# Altium PCB CuC_PCB.PcbDoc (part 1 of 4)
Units mm, origin at the board's own origin, x right, y up, seen from the top; angles counter-clockwise.
Board outline 203.71 x 204.22 mm, 2 copper layers (Top Layer, Bottom Layer); 421 components, 374 nets, 1366 pads, 155 vias.
Unrouted connection lines stored in the file: 2.
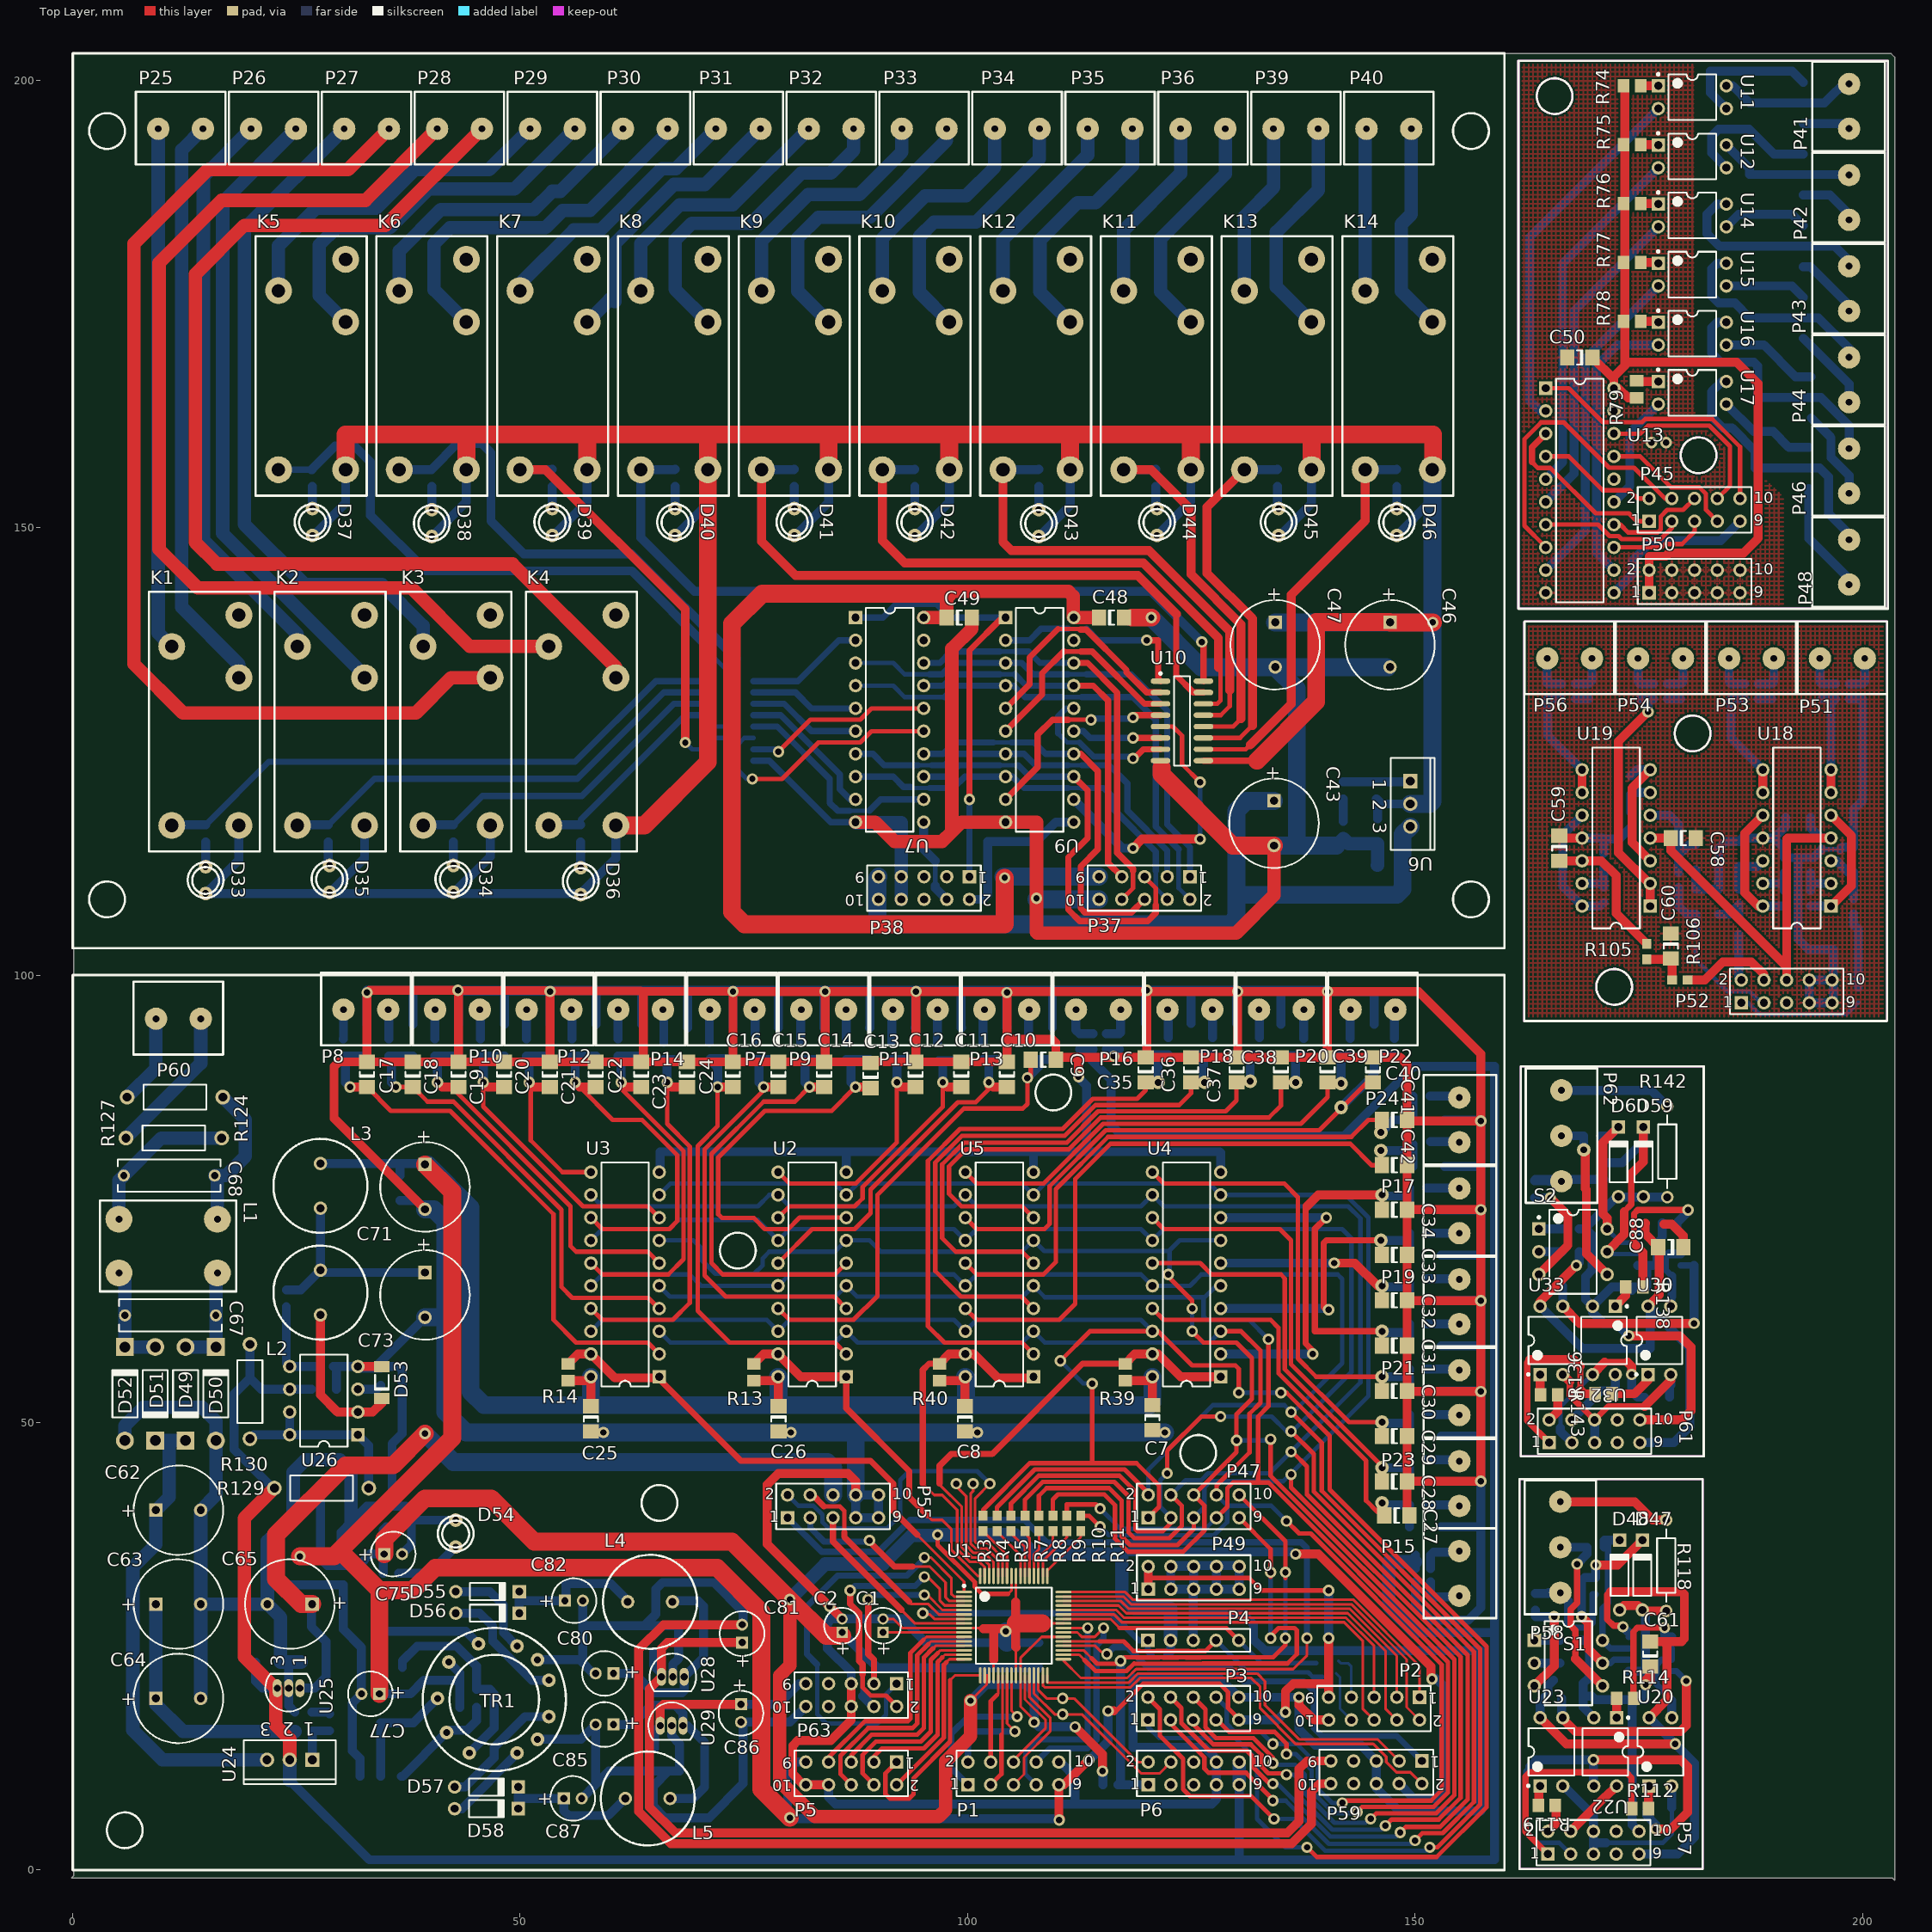
[diagram p0: Top Layer view]
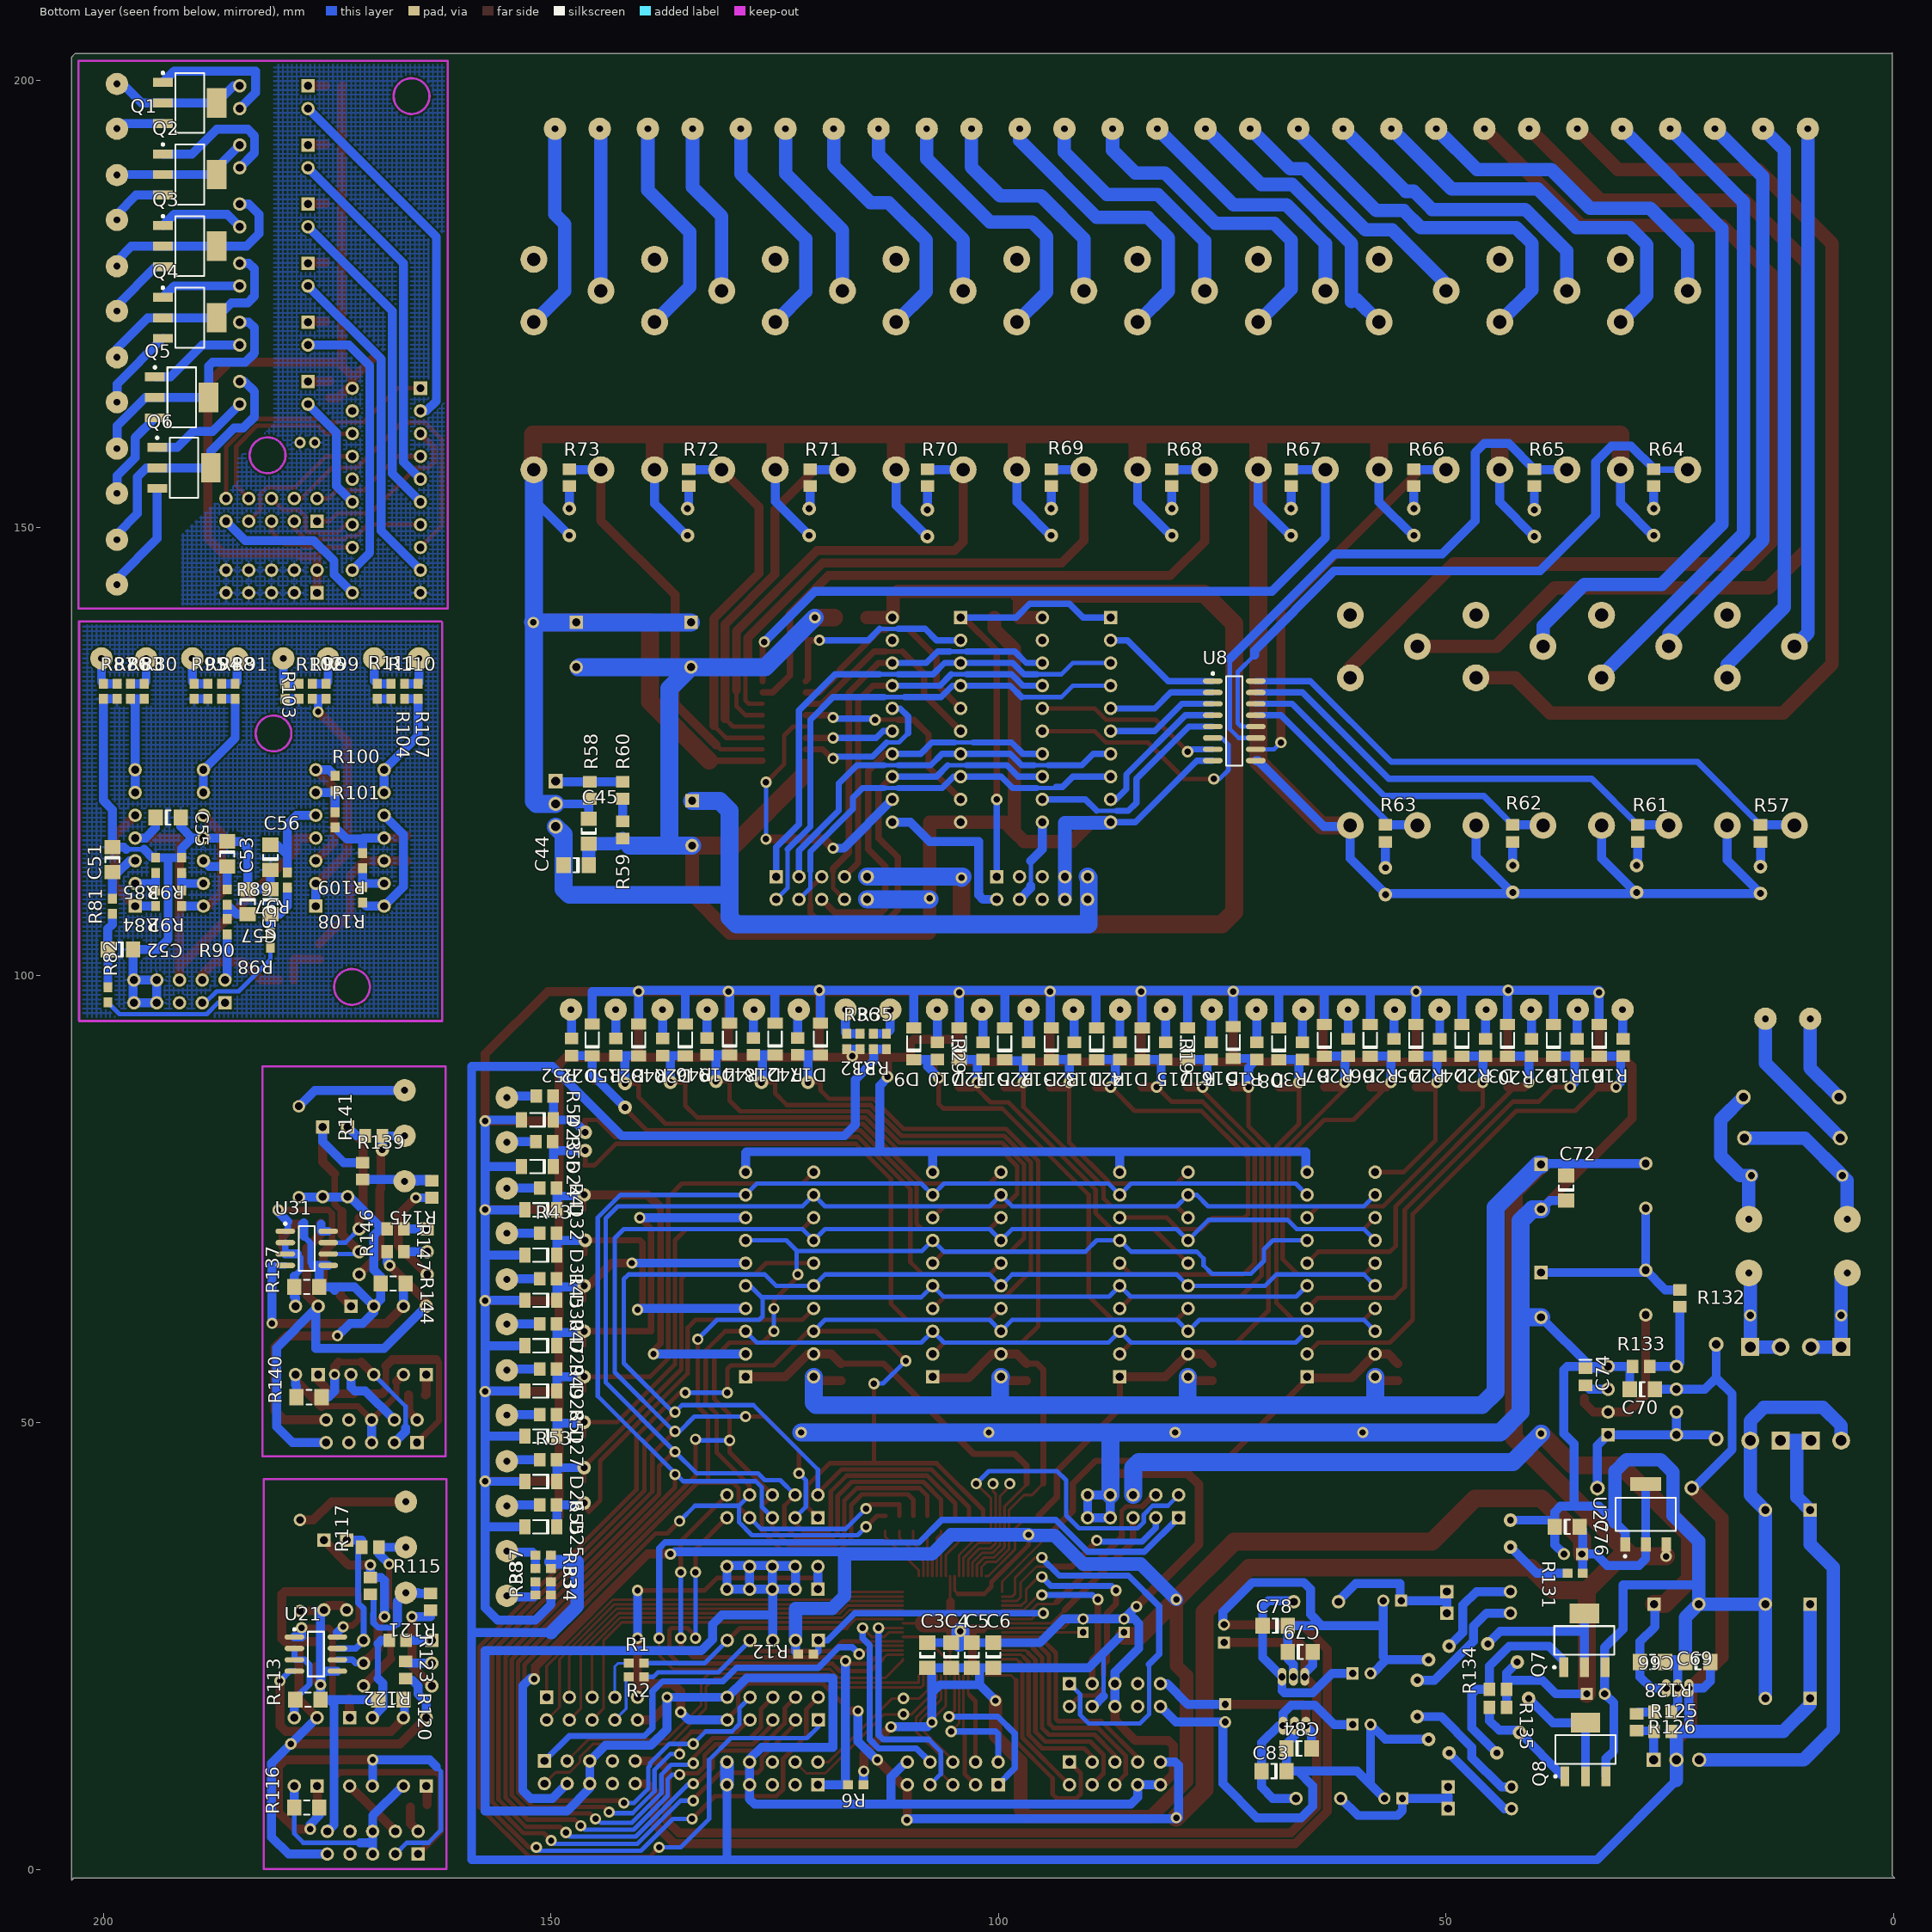
[diagram p1: Bottom Layer view, seen from below]

## Layer stack, top to bottom
Top Solder: solder mask 0.0102, Solder Resist, Dk 3.5
Top Layer: signal copper 0.0356
Dielectric1: dielectric 0.32, FR-4, Dk 4.8
Bottom Layer: signal copper 0.0356
Bottom Solder: solder mask 0.0102, Solder Resist, Dk 3.5

## Board outline
0.127,203.073 0.254,202.946 203.2,202.946 203.581,202.565 203.581,-1.143 203.327,-0.889 -0.127,-0.889 0.127,-0.635 0.127,202.946

## Design rules (kind name [scope] priority, off if disabled: settings)
Clearance [All] p1: gap=0.2
PolygonConnect [All] p1: connectstyle=Relief reliefconductorwidth=0.254 reliefentries=4 polygonreliefangle="90 Angle" airgapwidth=0.254
RoutingVias [All] p1: holewidth=0.711 width=1.27 viastyle="Through Hole" minholewidth=0.711 minwidth=1.27 maxholewidth=0.711 maxwidth=1.27
SolderMaskExpansion [All] p1: expansion=0.102
Width [All] p1: maxlimit=3 minlimit=0.2 preferedwidth=0.5
29 further rules are at their usual default settings.

## Classes and differential pairs
component class RelayOutput: C43 C44 C45 C46 C47 C48 C49 D33 D34 D35 D36 D37 D38 D39 D40 D41 D42 D43 D44 D45 D46 K1 K2 K3 K4 K5 K6 K7 K8 K9 K10 K11 K12 K13 K14 P25 P26 P27 P28 P29 P30 P31 P32 P33 P34 P35 P36 P37 P38 P39 P40 R57 R58 R59 R60 R61 R62 R63 R64 R65 R66 R67 R68 R69 R70 R71 R72 R73 U6 U7 U8 U9 U10
component class DigitalOutput: C50 P41 P42 P43 P44 P45 P46 P47 P48 P49 P50 Q1 Q2 Q3 Q4 Q5 Q6 R74 R75 R76 R77 R78 R79 U11 U12 U13 U14 U15 U16 U17
component class DigitalInput: C7 C8 C9 C10 C11 C12 C13 C14 C15 C16 C17 C18 C19 C20 C21 C22 C23 C24 C25 C26 C27 C28 C29 C30 C31 C32 C33 C34 C35 C36 C37 C38 C39 C40 C41 C42 D1 D2 D3 D4 D5 D6 D7 D8 D9 D10 D11 D12 D13 D14 D15 D16 D17 D18 D19 D20 D21 D22 D23 D24 D25 D26 D27 D28 D29 D30 D31 D32 P7 P8 P9 P10 P11 P12 P13 P14 P15 P16 P17 P18 P19 P20 P21 P22 P23 P24 R13 R14 R15 R16 R17 R18 R19 R20 R21 R22 R23 R24 R25 R26 R27 R28 R29 R30 R31 R32 R33 R34 R35 R36 R37 R38 R39 R40 R41 R42 R43 R44 R45 R46 R47 R48 R49 R50 R51 R52 R53 R54 R55 R56 U2 U3 U4 U5
component class CuC: C1 C2 C3 C4 C5 C6 P1 P2 P3 P4 P5 P6 R1 R2 R3 R4 R5 R6 R7 R8 R9 R10 R11 R12 U1
component class CuC_PSU: C62 C63 C64 C65 C66 C67 C68 C69 C70 C71 C72 C73 C74 C75 C76 C77 C78 C79 C80 C81 C82 C83 C84 C85 C86 C87 D49 D50 D51 D52 D53 D54 D55 D56 D57 D58 L1 L2 L3 L4 L5 P60 Q7 Q8 R124 R125 R126 R127 R128 R129 R130 R131 R132 R133 R134 R135 TR1 U24 U25 U26 U27 U28 U29
component class CuC_DataComm: C61 D47 D48 P57 P58 P59 R112 R113 R114 R115 R116 R117 R118 R119 R120 R121 R122 R123 S1 U20 U21 U22 U23
component class CuC_ControlComm: C88 D59 D60 P61 P62 P63 R136 R137 R138 R139 R140 R141 R142 R143 R144 R145 R146 R147 S2 U30 U31 U32 U33
component class AnalogOutput: C51 C52 C53 C54 C55 C56 C57 C58 C59 C60 P51 P52 P53 P54 P55 P56 R80 R81 R82 R83 R84 R85 R86 R87 R88 R89 R90 R91 R92 R93 R94 R95 R96 R97 R98 R99 R100 R101 R102 R103 R104 R105 R106 R107 R108 R109 R110 R111 U18 U19

## Components (designator, comment, footprint, x,y, rotation, side; value= is the part's Value field where it differs from the comment)
C1 "10uF" CAPPR1.5-4X7 90.551,27.305 r90 top
C2 "4u7" CAPPR1.5-4X7 85.979,27.305 r90 top
C3 "" 1206 107.95,24.003 r90 bottom
C4 "" 1206 105.283,24.003 r90 bottom
C5 "" 1206 102.997,24.003 r90 bottom
C6 "" 1206 100.584,24.003 r90 bottom
C7 "" 1206 120.65,50.546 r270 top
C8 "" 1206 99.695,50.419 r270 top
C9 "" 1206 108.458,90.551 r0 top
C10 "" 1206 104.394,88.9 r90 top
C11 "" 1206 99.287,88.9 r90 top
C12 "" 1206 94.18,88.9 r90 top
C13 "" 1206 89.154,88.773 r90 top
C14 "" 1206 83.965,88.9 r90 top
C15 "" 1206 78.858,88.9 r90 top
C16 "" 1206 73.751,88.9 r90 top
C17 "" 1206 32.893,88.9 r90 top
C18 "" 1206 38,88.9 r90 top
C19 "" 1206 43.107,88.9 r90 top
C20 "" 1206 48.215,88.9 r90 top
C21 "" 1206 53.322,88.9 r90 top
C22 "" 1206 58.429,88.9 r90 top
C23 "" 1206 63.536,88.9 r90 top
C24 "" 1206 68.643,88.9 r90 top
C25 "" 1206 57.912,50.419 r270 top
C26 "" 1206 78.867,50.419 r270 top
C27 "" 1206 147.955,39.624 r0 top
C28 "" 1206 147.701,43.416 r0 top
C29 "" 1206 147.701,48.478 r0 top
C30 "" 1206 147.701,53.54 r0 top
C31 "" 1206 147.701,58.601 r0 top
C32 "" 1206 147.701,63.663 r0 top
C33 "" 1206 147.701,68.725 r0 top
C34 "" 1206 147.701,73.787 r0 top
C35 "" 1206 119.888,89.408 r90 top
C36 "" 1206 124.968,89.408 r90 top
C37 "" 1206 130.048,89.408 r90 top
C38 "" 1206 135.001,89.408 r90 top
C39 "" 1206 140.208,89.408 r90 top
C40 "" 1206 145.288,89.408 r90 top
C41 "" 1206 147.701,83.82 r0 top
C42 "" 1206 147.701,78.768 r0 top
C43 "470uF" CAPPR5-10X16 134.239,116.967 r270 top
C44 "" 1206 147.193,112.268 r0 bottom
C45 "" 1206 145.796,116.078 r90 bottom
C46 "470uF" CAPPR5-10X16 147.193,136.906 r270 top
C47 "470uF" CAPPR5-10X16 134.366,136.906 r270 top
C48 "" 1206 116.078,139.954 r0 top
C49 "" 1206 99.06,139.954 r0 top
C50 "" 1206 168.402,169.001 r180 top
C51 "" 1206 199.009,112.903 r270 bottom
C52 "" 1206 198.12,102.87 r0 bottom
C53 "" 1206 186.182,113.538 r270 bottom
C54 "" 1206 183.896,108.204 r270 bottom
C55 "" 1206 192.786,117.602 r180 bottom
C56 "" 1206 181.356,113.157 r90 bottom
C57 "" 1206 181.356,108.204 r270 bottom
C58 "" 1206 179.959,115.316 r0 top
C59 "" 1206 166.116,114.173 r270 top
C60 "" 1206 178.562,103.251 r270 top
C61 "100nF" 1206 176.276,24.13 r90 top
C62 "470uF" CAPPR5-10X16 11.811,40.208 r0 top
C63 "470uF" CAPPR5-10X16 11.811,29.718 r0 top
C64 "470uF" CAPPR5-10X16 11.811,19.177 r0 top
C65 "470uF" CAPPR5-10X16 24.257,29.718 r180 top
C66 "" 1206 21.844,23.241 r180 bottom
C67 "220nF" VP60-3.6 10.922,61.976 r0 top
C68 "100nF" VP60-3.6 10.795,77.597 r0 top
C69 "" 1206 26.924,23.241 r0 bottom
C70 "" 1206 28.067,53.721 r180 bottom
C71 "470uF" CAPPR5-10X16 39.37,76.327 r270 top
C72 "" 1206 36.576,76.2 r90 bottom
C73 "470uF" CAPPR5-10X16 39.37,64.262 r270 top
C74 "" 0805 34.417,55.118 r270 bottom
C75 "100uF" CAPPR2-5X11 35.814,35.306 r0 top
C76 "" 1206 36.449,38.354 r180 bottom
C77 "100uF" CAPPR2-5X11 33.274,19.685 r180 top
C78 "" 1206 69.088,27.305 r0 bottom
C79 "" 1206 66.294,24.384 r180 bottom
C80 "100uF" CAPPR2-5X11 59.436,21.971 r180 top
C81 "100uF" CAPPR2-5X11 74.803,26.416 r90 top
C82 "100uF" CAPPR2-5X11 56.007,30.099 r0 top
C83 "" 1206 69.215,11.049 r0 bottom
C84 "" 1206 66.421,13.589 r180 bottom
C85 "100uF" CAPPR2-5X11 59.436,16.256 r180 top
C86 "100uF" CAPPR2-5X11 74.676,17.526 r270 top
C87 "100uF" CAPPR2-5X11 55.88,8.001 r0 top
C88 "100nF" 1206 178.562,69.596 r180 top
D1 "5V1" SOD80C 32.885,92.71 r270 bottom
D2 "5V1" SOD80C 38.002,92.71 r270 bottom
D3 "5V1" SOD80C 43.12,92.71 r270 bottom
D4 "5V1" SOD80C 48.237,92.71 r270 bottom
D5 "5V1" SOD80C 53.355,92.71 r270 bottom
D6 "5V1" SOD80C 58.472,92.71 r270 bottom
D7 "5V1" SOD80C 63.59,92.71 r270 bottom
D8 "5V1" SOD80C 68.697,92.329 r270 bottom
D9 "5V1" SOD80C 109.474,92.329 r270 bottom
D10 "5V1" SOD80C 104.394,92.329 r270 bottom
D11 "5V1" SOD80C 99.314,92.329 r270 bottom
D12 "5V1" SOD80C 94.107,92.329 r270 bottom
D13 "5V1" SOD80C 89.027,92.329 r270 bottom
D14 "5V1" SOD80C 83.947,92.329 r270 bottom
D15 "5V1" SOD80C 78.867,92.329 r270 bottom
D16 "5V1" SOD80C 73.787,92.456 r270 bottom
D17 "5V1" SOD80C 119.888,92.837 r270 bottom
D18 "5V1" SOD80C 124.968,92.837 r270 bottom
D19 "5V1" SOD80C 130.048,92.837 r270 bottom
D20 "5V1" SOD80C 135.001,92.748 r270 bottom
D21 "5V1" SOD80C 140.208,92.748 r270 bottom
D22 "5V1" SOD80C 145.415,92.748 r270 bottom
D23 "5V1" SOD80C 151.511,83.82 r180 bottom
D24 "5V1" SOD80C 151.511,78.613 r180 bottom
D25 "5V1" SOD80C 151.13,38.354 r180 bottom
D26 "5V1" SOD80C 151.13,43.413 r180 bottom
D27 "5V1" SOD80C 151.13,48.473 r180 bottom
D28 "5V1" SOD80C 151.13,53.532 r180 bottom
D29 "5V1" SOD80C 151.13,58.592 r180 bottom
D30 "5V1" SOD80C 151.13,63.651 r180 bottom
D31 "5V1" SOD80C 151.13,68.711 r180 bottom
D32 "5V1" SOD80C 151.13,73.77 r180 bottom
D33 "LED 3mm" "LED 3mm" 14.859,110.617 r270 top
D34 "LED 3mm" "LED 3mm" 42.545,110.744 r270 top
D35 "LED 3mm" "LED 3mm" 28.702,110.744 r270 top
D36 "LED 3mm" "LED 3mm" 56.769,110.49 r270 top
D37 "LED 3mm" "LED 3mm" 26.797,150.622 r270 top
D38 "LED 3mm" "LED 3mm" 40.132,150.495 r270 top
D39 "LED 3mm" "LED 3mm" 53.594,150.622 r270 top
D40 "LED 3mm" "LED 3mm" 67.31,150.622 r270 top
D41 "LED 3mm" "LED 3mm" 80.645,150.622 r270 top
D42 "LED 3mm" "LED 3mm" 94.107,150.622 r270 top
D43 "LED 3mm" "LED 3mm" 107.95,150.495 r270 top
D44 "LED 3mm" "LED 3mm" 121.158,150.622 r270 top
D45 "LED 3mm" "LED 3mm" 134.747,150.622 r270 top
D46 "LED 3mm" "LED 3mm" 147.955,150.622 r270 top
D47 "13V" DO-35A 175.387,32.959 r90 top
D48 "13V" DO-35A 172.847,32.959 r90 top
D49 "1N4001" DO-41 12.615,53.213 r270 top
D50 "1N4001" DO-41 16.002,53.213 r90 top
D51 "1N4001" DO-41 9.229,53.213 r270 top
D52 "1N4001" DO-41 5.842,53.213 r90 top
D53 "BAV102" SOD80C 34.544,54.483 r270 top
D54 "3V3 POWER OK" "LED 3mm" 42.799,37.592 r270 top
D55 "1N4148" DO-35 46.355,31.115 r0 top
D56 "1N4148" DO-35 46.355,28.702 r0 top
D57 "1N4148" DO-35 46.228,9.271 r0 top
D58 "1N4148" DO-35 46.228,6.858 r0 top
D59 "13V" DO-35A 175.514,79.134 r90 top
D60 "13V" DO-35A 172.72,79.134 r90 top
K1 "FINDER RELAY 40.31" "FINDER 40.31" 14.224,128.016 r90 top
K2 "FINDER RELAY 40.31" "FINDER 40.31" 28.266,128.016 r90 top
K3 "FINDER RELAY 40.31" "FINDER 40.31" 42.307,128.016 r90 top
K4 "FINDER RELAY 40.31" "FINDER 40.31" 56.349,128.016 r90 top
K5 "FINDER RELAY 40.31" "FINDER 40.31" 26.152,167.767 r90 top
K6 "FINDER RELAY 40.31" "FINDER 40.31" 39.644,167.767 r90 top
K7 "FINDER RELAY 40.31" "FINDER 40.31" 53.135,167.767 r90 top
K8 "FINDER RELAY 40.31" "FINDER 40.31" 66.626,167.767 r90 top
K9 "FINDER RELAY 40.31" "FINDER 40.31" 80.117,167.767 r90 top
K10 "FINDER RELAY 40.31" "FINDER 40.31" 93.609,167.767 r90 top
K11 "FINDER RELAY 40.31" "FINDER 40.31" 120.591,167.767 r90 top
K12 "FINDER RELAY 40.31" "FINDER 40.31" 107.1,167.767 r90 top
K13 "FINDER RELAY 40.31" "FINDER 40.31" 134.083,167.767 r90 top
K14 "FINDER RELAY 40.31" "FINDER 40.31" 147.574,167.767 r90 top
L1 "CMC filter" "MREZNI FILTER" 10.668,69.723 r0 top
L2 "" RB5-10.5 27.686,64.516 r90 top
L3 "" RB5-10.5 27.686,76.454 r90 top
L4 "" RB5-10.5 64.516,29.972 r0 top
L5 "" RB5-10.5 64.262,8.001 r0 top
P1 "PORTA" HDR2X5 100.034,9.525 r0 top
P2 "PORTB" HDR2X5 150.495,19.304 r180 top
P3 "DATA_BUS" HDR2X5 120.142,16.764 r0 top
P4 "PICKIT3_ICSP" HDR1X5 120.142,25.654 r0 top
P5 "PORTF" HDR2X5 92.075,12.065 r180 top
P6 "OUTPUT_CONTROL" HDR2X5 120.184,9.525 r0 top
P7 "" "TERMINAL BLOK 2" 73.683,96.139 r90 top
P8 "" "TERMINAL BLOK 2" 32.766,96.139 r90 top
P9 "" "TERMINAL BLOK 2" 83.912,96.139 r90 top
P10 "" "TERMINAL BLOK 2" 42.995,96.139 r90 top
P11 "" "TERMINAL BLOK 2" 94.142,96.139 r90 top
P12 "" "TERMINAL BLOK 2" 53.225,96.139 r90 top
P13 "" "TERMINAL BLOK 2" 104.371,96.139 r90 top
P14 "" "TERMINAL BLOK 2" 63.454,96.139 r90 top
P15 "" "TERMINAL BLOK 2" 154.94,33.147 r0 top
P16 "" "TERMINAL BLOK 2" 114.6,96.139 r90 top
P17 "" "TERMINAL BLOK 2" 154.94,73.66 r0 top
P18 "" "TERMINAL BLOK 2" 124.829,96.139 r90 top
P19 "" "TERMINAL BLOK 2" 154.94,63.5 r0 top
P20 "" "TERMINAL BLOK 2" 135.059,96.139 r90 top
P21 "" "TERMINAL BLOK 2" 154.94,53.34 r0 top
P22 "" "TERMINAL BLOK 2" 145.288,96.139 r90 top
P23 "" "TERMINAL BLOK 2" 154.94,43.18 r0 top
P24 "" "TERMINAL BLOK 2" 154.94,83.82 r0 top
P25 "VACUM_PUMP1" "TERMINAL BLOK 2" 12.065,194.564 r90 top
P26 "VACUM_PUMP2" "TERMINAL BLOK 2" 22.45,194.564 r90 top
P27 "VACUM_PUMP3" "TERMINAL BLOK 2" 32.834,194.564 r90 top
P28 "VACUM_PUMP4" "TERMINAL BLOK 2" 43.219,194.564 r90 top
P29 "FEEDER1_VACUM_VALVE" "TERMINAL BLOK 2" 53.604,194.564 r90 top
P30 "FEEDER2_VACUM_VALVE" "TERMINAL BLOK 2" 63.988,194.564 r90 top
P31 "FEEDER3_VACUM_VALVE" "TERMINAL BLOK 2" 74.373,194.564 r90 top
P32 "FEEDER4_VACUM_VALVE" "TERMINAL BLOK 2" 84.758,194.564 r90 top
P33 "FEEDER1_CLEANING_VALVE" "TERMINAL BLOK 2" 95.143,194.564 r90 top
P34 "FEEDER2_CLEANING_VALVE" "TERMINAL BLOK 2" 105.527,194.564 r90 top
P35 "FEEDER3_CLEANING_VALVE" "TERMINAL BLOK 2" 115.912,194.564 r90 top
P36 "FEEDER4_CLEANING_VALVE" "TERMINAL BLOK 2" 126.297,194.564 r90 top
P37 "Header 5X2" HDR2X5 124.841,110.998 r180 top
P38 "Header 5X2" HDR2X5 100.203,110.998 r180 top
P39 "WATCH_DOG" "TERMINAL BLOK 2" 136.681,194.564 r90 top
P40 "ALARM" "TERMINAL BLOK 2" 147.066,194.564 r90 top
P41 "DRIVE_1_RUN" "TERMINAL BLOK 2" 198.501,197.068 r180 top
P42 "DRIVE_2_RUN" "TERMINAL BLOK 2" 198.501,186.883 r180 top
P43 "DRIVE_3_RUN" "TERMINAL BLOK 2" 198.501,176.697 r180 top
P44 "DRIVE_4_RUN" "TERMINAL BLOK 2" 198.501,166.512 r180 top
P45 "Header 5X2" HDR2X5 176.149,150.713 r0 top
P46 "AUX_0" "TERMINAL BLOK 2" 198.501,156.326 r180 top
P47 "Header 5X2" HDR2X5 120.184,39.37 r0 top
P48 "AUX_1" "TERMINAL BLOK 2" 198.501,146.141 r180 top
P49 "Header 5X2" HDR2X5 120.184,31.369 r0 top
P50 "Header 5X2" HDR2X5 176.149,142.712 r0 top
P51 "AN0_OUT" "TERMINAL BLOK 2" 197.739,135.382 r90 top
P52 "Header 5X2" HDR2X5 186.436,96.901 r0 top
P53 "AN1_OUT" "TERMINAL BLOK 2" 187.579,135.382 r90 top
P54 "AN2_OUT" "TERMINAL BLOK 2" 177.419,135.382 r90 top
P55 "Header 5X2" HDR2X5 79.883,39.37 r0 top
P56 "AN3_OUT" "TERMINAL BLOK 2" 167.259,135.382 r90 top
P57 "Header 5X2" HDR2X5 164.846,1.778 r0 top
P58 "RS485" "TERMINAL BLOK 3" 166.23,36.068 r0 top
P59 "Header 5X2" HDR2X5 150.749,12.192 r180 top
P60 "T.blok 2" "TERMINAL BLOK 2" 11.811,95.123 r90 top
P61 "Header 5X2" HDR2X5 164.973,47.752 r0 top
P62 "RS485" "TERMINAL BLOK 3" 166.357,82.042 r0 top
P63 "Header 5X2" HDR2X5 92.075,20.828 r180 top
Q1 "BCP56" SOT223_N 190.373,197.449 r180 bottom
Q2 "BCP56" SOT223_N 190.373,189.448 r180 bottom
Q3 "BCP56" SOT223_N 190.373,181.447 r180 bottom
Q4 "BCP56" SOT223_N 190.373,173.446 r180 bottom
Q5 "BCP56" SOT223_N 191.262,164.556 r180 bottom
Q6 "BCP56" SOT223_N 191.008,156.682 r180 bottom
Q7 "BCP56-10" SOT223_N 34.544,25.654 r90 bottom
Q8 "BCP56-10" SOT223_N 34.417,13.462 r90 bottom
R1 "10K" ERA-0603 140.462,23.114 r180 bottom
R2 "10K" ERA-0603 140.462,21.59 r180 bottom
R3 "47R" ERA-0603 101.727,38.735 r90 top
R4 "47R" ERA-0603 103.287,38.735 r90 top
R5 "47R" ERA-0603 104.848,38.735 r90 top
R6 "10K" ERA-0603 115.951,9.525 r180 bottom
R7 "47R" ERA-0603 106.408,38.735 r90 top
R8 "47R" ERA-0603 107.968,38.735 r90 top
R9 "47R" ERA-0603 109.528,38.735 r90 top
R10 "47R" ERA-0603 111.089,38.735 r90 top
R11 "47R" ERA-0603 112.649,38.735 r90 top
R12 "10K" ERA-0603 121.539,24.13 r0 bottom
R13 "10K" ERA-0805 76.115,55.626 r270 top
R14 "10K" ERA-0805 55.372,55.626 r270 top
R15 "10K" ERA-0805 71.145,91.529 r270 bottom
R16 "10K" ERA-0805 30.226,91.91 r270 bottom
R17 "10K" ERA-0805 76.243,91.529 r270 bottom
R18 "10K" ERA-0805 35.343,91.91 r270 bottom
R19 "10K" ERA-0805 81.34,91.529 r270 bottom
R20 "10K" ERA-0805 40.461,91.91 r270 bottom
R21 "10K" ERA-0805 86.437,91.529 r270 bottom
R22 "10K" ERA-0805 45.578,91.91 r270 bottom
R23 "10K" ERA-0805 91.534,91.529 r270 bottom
R24 "10K" ERA-0805 50.696,91.91 r270 bottom
R25 "10K" ERA-0805 96.631,91.529 r270 bottom
R26 "10K" ERA-0805 55.813,91.91 r270 bottom
R27 "10K" ERA-0805 101.728,91.529 r270 bottom
R28 "10K" ERA-0805 60.931,91.91 r270 bottom
R29 "10K" ERA-0805 106.825,91.529 r270 bottom
R30 "10K" ERA-0805 66.048,91.529 r270 bottom
R31 "10R" ERA-0603 112.522,92.583 r270 bottom
R32 "10R" ERA-0603 114.004,92.583 r270 bottom
R33 "10R" ERA-0603 150.876,35.179 r180 bottom
R34 "10R" ERA-0603 150.876,33.697 r180 bottom
R35 "10R" ERA-0603 115.485,92.583 r90 bottom
R36 "10R" ERA-0603 116.967,92.583 r90 bottom
R37 "10R" ERA-0603 150.876,32.216 r0 bottom
R38 "10R" ERA-0603 150.876,30.734 r0 bottom
R39 "10K" ERA-0805 117.602,55.626 r270 top
R40 "10K" ERA-0805 96.859,55.626 r270 top
R41 "10K" ERA-0805 150.33,76.2 r180 bottom
R42 "10K" ERA-0805 122.428,92.037 r270 bottom
R43 "10K" ERA-0805 150.33,71.141 r180 bottom
R44 "10K" ERA-0805 127.381,92.037 r270 bottom
R45 "10K" ERA-0805 150.33,66.081 r180 bottom
R46 "10K" ERA-0805 132.588,92.037 r270 bottom
R47 "10K" ERA-0805 150.33,61.022 r180 bottom
R48 "10K" ERA-0805 137.541,91.948 r270 bottom
R49 "10K" ERA-0805 150.33,55.962 r180 bottom
R50 "10K" ERA-0805 142.748,91.948 r270 bottom
R51 "10K" ERA-0805 150.33,50.903 r180 bottom
R52 "10K" ERA-0805 147.701,91.948 r270 bottom
R53 "10K" ERA-0805 150.33,45.843 r180 bottom
R54 "10K" ERA-0805 150.711,86.487 r180 bottom
R55 "10K" ERA-0805 150.33,40.784 r180 bottom
R56 "10K" ERA-0805 150.749,81.407 r180 bottom
R57 "1K" ERA-0805 14.859,115.824 r90 bottom
R58 "240R" ERA-0805 145.669,120.65 r270 bottom
R59 "1K8" ERA-0805 141.986,116.205 r270 bottom
R60 "330R" ERA-0805 141.986,120.65 r270 bottom
R61 "1K" ERA-0805 28.575,115.824 r90 bottom
R62 "1K" ERA-0805 42.545,115.824 r90 bottom
R63 "1K" ERA-0805 56.769,115.824 r90 bottom
R64 "1K" ERA-0805 26.797,155.575 r90 bottom
R65 "1K" ERA-0805 40.132,155.575 r90 bottom
R66 "1K" ERA-0805 53.594,155.575 r90 bottom
R67 "1K" ERA-0805 67.31,155.575 r90 bottom
R68 "1K" ERA-0805 80.645,155.575 r90 bottom
R69 "1K" ERA-0805 94.107,155.575 r90 bottom
R70 "1K" ERA-0805 107.95,155.575 r90 bottom
R71 "1K" ERA-0805 121.031,155.575 r90 bottom
R72 "1K" ERA-0805 134.62,155.575 r90 bottom
R73 "1K" ERA-0805 147.955,155.575 r90 bottom
R74 "470R" ERA-0805 174.244,199.354 r180 top
R75 "470R" ERA-0805 174.244,192.775 r180 top
R76 "470R" ERA-0805 174.244,186.197 r180 top
R77 "470R" ERA-0805 174.244,179.618 r180 top
R78 "470R" ERA-0805 174.244,173.04 r180 top
R79 "470R" ERA-0805 174.752,165.445 r270 top
R80 "10R" ERA-0603 195.453,131.699 r90 bottom
R81 "2K7" ERA-0603 199.009,107.696 r270 bottom
R82 "2K7" ERA-0603 199.517,97.79 r270 bottom
R83 "10R" ERA-0603 196.977,131.699 r90 bottom
R84 "20K3" ERA-0603 194.183,108.585 r270 bottom
R85 "10K" ERA-0603 194.183,112.268 r270 bottom
R86 "10R" ERA-0603 198.501,131.699 r90 bottom
R87 "10R" ERA-0603 200.025,131.699 r90 bottom
R88 "10R" ERA-0603 186.817,131.699 r90 bottom
R89 "2K7" ERA-0603 186.182,108.712 r270 bottom
R90 "2K7" ERA-0603 186.182,105.41 r270 bottom
R91 "10R" ERA-0603 185.293,131.699 r90 bottom
R92 "20K3" ERA-0603 191.262,108.585 r270 bottom
R93 "10K" ERA-0603 191.262,112.268 r270 bottom
R94 "10R" ERA-0603 188.341,131.699 r90 bottom
R95 "10R" ERA-0603 189.865,131.699 r90 bottom
R96 "10R" ERA-0603 176.657,131.699 r90 bottom
R97 "2K7" ERA-0603 179.451,110.617 r270 bottom
R98 "2K7" ERA-0603 181.356,103.886 r270 bottom
R99 "10R" ERA-0603 175.133,131.699 r90 bottom
R100 "20K3" ERA-0603 174.117,121.412 r90 bottom
R101 "10K" ERA-0603 174.117,117.348 r90 bottom
R102 "10R" ERA-0603 178.181,131.699 r90 bottom
R103 "10R" ERA-0603 179.705,131.699 r90 bottom
R104 "10R" ERA-0603 166.37,131.699 r90 bottom
R105 "2K7" ERA-0603 175.895,102.616 r270 top
R106 "2K7" ERA-0603 179.578,99.441 r0 top
R107 "10R" ERA-0603 164.846,131.699 r90 bottom
R108 "20K3" ERA-0603 171.069,108.966 r270 bottom
R109 "10K" ERA-0603 171.069,112.776 r270 bottom
R110 "10R" ERA-0603 167.894,131.699 r90 bottom
R111 "10R" ERA-0603 169.418,131.699 r90 bottom
R112 "330R" ERA-0805 175.133,6.858 r180 top
R113 "820R" 8-1206 177.165,19.05 r0 bottom
R114 "220R" ERA-0805 173.482,19.177 r0 top
R115 "47R" ERA-0805 170.18,31.75 r90 bottom
R116 "820R" 8-1206 177.292,6.985 r0 bottom
R117 "47R" ERA-0805 170.18,36.068 r0 bottom
R118 "100R" AXIAL-0.4 178.054,34.036 r90 top
R119 "330R" ERA-0805 164.719,7.239 r0 top
R120 "820R" 8-1206 167.894,19.05 r180 bottom
R121 "120R" ERA-0805 163.449,29.972 r270 bottom
R122 "560R" ERA-0805 166.243,22.352 r270 bottom
R123 "560R" ERA-0805 167.132,25.654 r180 bottom
R124 "1R" R6.35x2.3 11.43,86.36 r180 top
R125 "240R" ERA-0805 25.781,15.494 r0 bottom
R126 "2K" ERA-0805 28.702,16.51 r270 bottom
R127 "1R" R6.35x2.3 11.303,81.788 r180 top
R128 "2K2" ERA-0805 25.781,17.653 r0 bottom
R129 "0R47" RD6.35x2.3 27.813,42.672 r0 top
R130 "0R47" RD6.35x2.3 19.812,53.467 r270 top
R131 "330R" ERA-0603 35.56,33.147 r0 bottom
R132 "3K6" ERA-0805 23.876,63.881 r90 bottom
R133 "1k2" ERA-0805 28.194,56.261 r180 bottom
R134 "10K" ERA-0805 44.196,20.193 r0 bottom
R135 "10K" ERA-0805 44.196,18.161 r180 bottom
R136 "330R" ERA-0805 171.069,53.213 r180 top
R137 "820R" 8-1206 177.292,65.151 r0 bottom
R138 "220R" ERA-0805 174.498,65.151 r0 top
R139 "47R" ERA-0805 171.069,78.105 r90 bottom
R140 "820R" 8-1206 177.038,52.832 r0 bottom
R141 "47R" ERA-0805 169.799,82.042 r0 bottom
R142 "100R" AXIAL-0.4 178.181,80.264 r90 top
R143 "330R" ERA-0805 164.973,53.086 r0 top
R144 "820R" 8-1206 167.64,65.532 r180 bottom
R145 "120R" ERA-0805 163.322,76.073 r270 bottom
R146 "560R" ERA-0805 167.386,69.088 r0 bottom
R147 "560R" ERA-0805 167.386,71.628 r180 bottom
S1 "" DIP-6 167.132,23.114 r0 top
S2 "" DIP-6 167.64,69.088 r0 top
TR1 "ISOLATION TRAFO 2" "ISOLATION TRAFO 2" 47.117,19.177 r0 top
U1 "PIC18F66J11-I/PT" TQFP-PT64_N 105.156,27.305 r0 top
U2 "SN54ALS244CJ" J020 82.635,66.548 r90 top
U3 "SN54ALS244CJ" J020 61.722,66.548 r90 top
U4 "SN54ALS244CJ" J020 124.46,66.548 r90 top
U5 "SN54ALS244CJ" J020 103.547,66.548 r90 top
U6 "LM317T" 221A-04 149.479,119.126 r270 top
U7 "SN74ALS374N" N020D 91.286,128.524 r270 top
U8 "ULN2003L" L16_N 73.66,128.401 r180 bottom
U9 "SN74ALS374N" N020D 108.05,128.524 r270 top
U10 "ULN2003L" L16_N 123.952,128.401 r0 top
U11 "PC817" DIP-4 180.975,198.084 r0 top
U12 "PC817" DIP-4 180.975,191.48 r0 top
U13 "SN74ALS374N" N020D 168.402,154.142 r270 top
U14 "PC817" DIP-4 180.975,184.876 r0 top
U15 "PC817" DIP-4 180.975,178.272 r0 top
U16 "PC817" DIP-4 180.975,171.668 r0 top
U17 "PC817" DIP-4 180.975,165.064 r0 top
U18 "LM324AN" DIP14 192.659,115.316 r90 top
U19 "LM324AN" DIP14 172.466,115.316 r90 top
U20 "PC817" DIP-4 177.419,13.208 r90 top
U21 "MAX485ESA" NSO8_N 176.276,24.13 r180 bottom
U22 "PC817" DIP-4 171.238,13.208 r270 top
U23 "PC817" DIP-4 165.227,13.208 r90 top
U24 "LM317T" 221A-04 24.257,12.319 r180 top
U25 "MC78L15ACP" 29-04 24.13,20.32 r90 top
U26 "MC34063AD" 626-05 28.067,52.451 r90 top
U27 "REG1117-3.3" ZZ311 27.686,39.751 r180 bottom
U28 "MC78L05ABP" 29-04 67.056,21.59 r270 top
U29 "MC78L05ABP" 29-04 66.929,16.129 r270 top
U30 "PC817" DIP-4 177.292,59.182 r90 top
U31 "MAX485ESA" NSO8_N 177.292,69.469 r180 bottom
U32 "PC817" DIP-4 171.09,59.182 r270 top
U33 "PC817" DIP-4 165.227,59.182 r90 top

## Footprints (in the part's own frame and the unit in brackets; to place one, negate y for a bottom-side part, rotate by r counter-clockwise, add the part's x,y. Pads: shape width x height; smd on the part's side, far side on the other; paste and mask are expansions set on the pad)
8-1206 [mm] "Chip Resistor; Body 3.1 x 1.6 mm (LxW typ)"
  rect 1.6x1.8 smd: 1(-1.4,0) 2(1.4,0)
  silkscreen extent -0.3,-0.8 0.3,0.8
29-04 [mm] "TO, Flat Index; 3 In-Line, Axial Leads; Body Dia. 4.8mm; Leads 0.48 x 0.5 mm (max)"
  oval 2x1 hole 0.8: 1(0,-1.27) 2(0,0) 3(0,1.27)
  silkscreen extent -2.6,-2.6 1.6,2.6
221A-04 [mm] "TO, Thru-Hole, Vertical, Heatsink Mounted; 3 In-Line Leads; Pitch 2.54 mm"
  rect 1.6x1.6 hole 1: 1(-2.54,0)
  round 1.6 hole 1: 2(0,0) 3(2.54,0)
  silkscreen extent -5.15,-2.2 5.15,2.7
626-05 [mm] "DIP; 8 Leads; Row Spacing 7.62 mm; Pitch 2.54 mm"
  rect 1.5x1.5 hole 0.9: 1(-3.81,-3.81)
  round 1.5 hole 0.9: 2(-1.27,-3.81) 3(1.27,-3.81) 4(3.81,-3.81) 5(3.81,3.81) 6(1.27,3.81) 7(-1.27,3.81) 8(-3.81,3.81)
  silkscreen extent -5.15,-2.65 5.15,2.65
0805 [mm] "Chip Capacitor; Body 2.0 x 1.2 mm (LxW typ)"
  rect 1.3x1.5 smd: 1(-0.95,0) 2(0.95,0)
  silkscreen extent -1.9,-0.65 -1.9,0.65
1206 [mm] "Chip Capacitor; Body 3.2 x 1.6 mm (LxW typ)"
  rect 1.6x1.8 smd: 1(-1.4,0) 2(1.4,0)
  silkscreen extent -0.3,-0.8 0.3,0.8
AXIAL-0.4 [mm] "Axial Device, Thru-Hole; 2 Leads; 0.4 in Pin Spacing"
  round 1.4 hole 0.85: 1(-5.08,0) 2(5.08,0)
  silkscreen extent -4.06,-1.02 4.06,1.02
CAPPR1.5-4X7 [mm] "Capacitor, Electrolytic, Radial; Body 4 x 7 mm (Dia.xH typ); Pin Spacing 1.5 mm (typ)"
  rect 1.25x1.25 hole 0.75: 1(-0.75,0)
  round 1.25 hole 0.75: 2(0.75,0)
  silkscreen extent -2,-2 2,2
CAPPR2-5X11 [mm] "Capacitor, Electrolytic, Radial; Body 5 x 11 mm (Dia.xH typ); Pin Spacing 2 mm (typ)"
  rect 1.35x1.35 hole 0.8: 1(-1,0)
  round 1.35 hole 0.8: 2(1,0)
  silkscreen extent -2.5,-2.5 2.5,2.5
CAPPR5-10X16 [mm] "Capacitor, Electrolytic, Radial; Body 10 x 16 mm (Dia.xH typ); Pin Spacing 5 mm (typ)"
  rect 1.5x1.5 hole 0.9: 1(-2.5,0)
  round 1.5 hole 0.9: 2(2.5,0)
  silkscreen extent -5,-5 5,5
DIP14 [mm] "DIP; 14 Leads; Row Spacing 7.62 mm; Pitch 2.54 mm"
  rect 1.5x1.5 hole 0.9: 1(-7.62,-3.81)
  round 1.5 hole 0.9: 2(-5.08,-3.81) 3(-2.54,-3.81) 4(0,-3.81) 5(2.54,-3.81) 6(5.08,-3.81) 7(7.62,-3.81) 8(7.62,3.81) 9(5.08,3.81) 10(2.54,3.81) 11(0,3.81) 12(-2.54,3.81) 13(-5.08,3.81) 14(-7.62,3.81)
  silkscreen extent -10.1,-2.65 10.1,2.65
DIP-4 [mm] "DIP; 4 Leads; Row Spacing 7.62 mm; Pitch 2.54 mm"
  rect 1.5x1.5 hole 0.9: 1(-3.81,1.27)
  round 1.5 hole 0.9: 2(-3.81,-1.27) 3(3.81,-1.27) 4(3.81,1.27)
  silkscreen extent -3.93,-2.55 2.65,2.69, body extent -3.15,-2.5 3.15,2.5, height 5.6
DIP-6 [mm] "DIP; 6 Leads; Row Spacing 7.62 mm; Pitch 2.54 mm"
  rect 1.5x1.5 hole 0.9: 1(-3.81,2.54)
  round 1.5 hole 0.9: 2(-3.81,0) 3(-3.81,-2.54) 4(3.81,-2.54) 5(3.81,0) 6(3.81,2.54)
  silkscreen extent -3.93,-4.7 2.65,4.7, body extent -3.55,-4.7 3.55,4.7, height 5.46
DO-35 [mm] "Diode, Axial; Body 3.8 x 1.9 mm (LxDia. max), Lead Dia. 0.53 mm (max)"
  round 1.5 hole 0.9: 1(-3.55,0)
  rect 1.5x1.5 hole 0.9: 2(3.55,0)
  silkscreen extent -1.95,-0.95 2.05,0.95
DO-35A [mm] "Diode, Axial; Body 4.6 x 1.9 mm (LxDia. max), Lead Dia. 0.53 mm (max)"
  round 1.5 hole 0.9: 1(-3.9,0)
  rect 1.5x1.5 hole 0.9: 2(3.9,0)
  silkscreen extent -2.3,-1 2.4,1
DO-41 [mm] "Diode, Axial; Body 5.2 x 2.7 mm (LxDia. max), Lead Dia. 0.86 mm (max)"
  round 2 hole 1.2: 1(-5.23,0)
  rect 2x2 hole 1.2: 2(5.23,0)
  silkscreen extent -2.65,-1.4 2.75,1.4
ERA-0603 [mm] "Chip Resistor; Body 1.6 x 0.8 mm (LxW typ)"
  rect 1.1x1 smd: 1(-0.85,0) 2(0.85,0)
ERA-0805 [mm] "Chip Resistor; Body 2 x 1.3 mm (LxW typ)"
  rect 1.3x1.5 smd: 1(-0.95,0) 2(0.95,0)
"FINDER 40.31" [mm] "Finder raly tip 40.31"
  round 3 hole 1.5: 1(-11.3,-4.35) 2(-11.3,3.15) 3(5.2,-4.35) 4(8.7,3.15) 5(12.2,-4.35)
  silkscreen extent -14.2,-6.7 14.8,5.7
HDR1X5 [mm] "Connector; Header; 5 Position"
  rect 1.5x1.5 hole 0.9: 1(0,0)
  round 1.5 hole 0.9: 2(2.54,0) 3(5.08,0) 4(7.62,0) 5(10.16,0)
  silkscreen extent -1.27,-1.27 11.43,1.27
HDR2X5 [mm] "Connector; Header; 5x2 Position"
  rect 1.5x1.5 hole 0.9: 1(0,0)
  round 1.5 hole 0.9: 2(0,2.54) 3(2.54,0) 4(2.54,2.54) 5(5.08,0) 6(5.08,2.54) 7(7.62,0) 8(7.62,2.54) 9(10.16,0) 10(10.16,2.54)
  silkscreen extent -1.27,-1.27 11.43,3.81
"ISOLATION TRAFO 2" [mil] "SMPS ferite toroid trafo"
  round 60 hole 30: 1(-110,-240) 2(-210,-150) 3(-250,0) 4(-200,160) 5(-70,240) 6(100,230) 7(190,170) 8(240,80) 9(240,-80) 10(190,-180) 11(100,-240)
  silkscreen extent -315,-320 315,310
J020 [mm] "DIP; 20 Leads; Row Spacing 7.62 mm; Pitch 2.54 mm"
  rect 1.5x1.5 hole 0.9: 1(-11.43,-3.81)
  round 1.5 hole 0.9: 2(-8.89,-3.81) 3(-6.35,-3.81) 4(-3.81,-3.81) 5(-1.27,-3.81) 6(1.27,-3.81) 7(3.81,-3.81) 8(6.35,-3.81) 9(8.89,-3.81) 10(11.43,-3.81) 11(11.43,3.81) 12(8.89,3.81) 13(6.35,3.81) 14(3.81,3.81) 15(1.27,3.81) 16(-1.27,3.81) 17(-3.81,3.81) 18(-6.35,3.81) 19(-8.89,3.81) 20(-11.43,3.81)
  silkscreen extent -12.5,-2.65 12.5,2.65
L16_N [mm] "SOIC, 16-Leads, Body 9.9x3.9mm, Pitch 1.27mm, IPC Medium Density"
  oval 2.2x0.6 smd: 1(-2.4,4.445) 2(-2.4,3.175) 3(-2.4,1.905) 4(-2.4,0.635) 5(-2.4,-0.635) 6(-2.4,-1.905) 7(-2.4,-3.175) 8(-2.4,-4.445) 9(2.4,-4.445) 10(2.4,-3.175) 11(2.4,-1.905) 12(2.4,-0.635) 13(2.4,0.635) 14(2.4,1.905) 15(2.4,3.175) 16(2.4,4.445)
  silkscreen extent -2.53,-5 0.9,5.42, body extent -1.95,-4.95 1.95,4.95, height 1.75
"LED 3mm" [mil] "LED 3mm"
  round 60 hole 30: 1(-59.06,0) 2(59.06,0)
  silkscreen extent -79,-79 79,79
"MREZNI FILTER" [mm] "Filter mrežnih smetnji"
  round 3 hole 0.762: 1(5.5,3) 2(5.5,-3) 3(-5.5,3) 4(-5.5,-3)
  silkscreen extent -7.62,-5.08 7.62,5.08
N020D [mm] "DIP; 20 Leads; Row Spacing 7.62 mm; Pitch 2.54 mm"
  rect 1.5x1.5 hole 0.9: 1(-11.43,-3.81)
  round 1.5 hole 0.9: 2(-8.89,-3.81) 3(-6.35,-3.81) 4(-3.81,-3.81) 5(-1.27,-3.81) 6(1.27,-3.81) 7(3.81,-3.81) 8(6.35,-3.81) 9(8.89,-3.81) 10(11.43,-3.81) 11(11.43,3.81) 12(8.89,3.81) 13(6.35,3.81) 14(3.81,3.81) 15(1.27,3.81) 16(-1.27,3.81) 17(-3.81,3.81) 18(-6.35,3.81) 19(-8.89,3.81) 20(-11.43,3.81)
  silkscreen extent -12.5,-2.65 12.5,2.65
NSO8_N [mm] "SOIC, 8-Leads, Body 4.9x3.9mm, Pitch 1.27mm, IPC Medium Density"
  oval 2.2x0.6 smd: 1(-2.4,1.905) 2(-2.4,0.635) 3(-2.4,-0.635) 4(-2.4,-1.905) 5(2.4,-1.905) 6(2.4,-0.635) 7(2.4,0.635) 8(2.4,1.905)
  silkscreen extent -2.53,-2.5 0.9,2.88, body extent -2,-2.5 2,2.5, height 1.75
R6.35x2.3 [mm] "Resistor, Axial; Body 7 x 2.8 mm (LxDia. max), Lead Dia. 0.7 mm (max)"
  round 1.65 hole 1: 1(-5.35,0) 2(5.35,0)
  silkscreen extent -3.5,-1.4 3.5,1.4
RB5-10.5 [mm] "Capacitor (Radial); 2 Leads"
  round 1.5 hole 0.9: 1(-2.5,0) 2(2.5,0)
  silkscreen extent -5.25,-5.25 5.25,5.25
RD6.35x2.3 [mm] "Resistor, Axial; Body 7 x 2.8 mm (LxDia. max), Lead Dia. 0.65 mm (max)"
  round 1.65 hole 1: 1(-5.275,0) 2(5.275,0)
  silkscreen extent -3.5,-1.4 3.5,1.4
SOD80C [mm] "Metal Electrode Face (MELF) Diode; Body 3.5 x 1.6 mm (LxDia)"
  rect 1.25x1.7 smd: 1(-1.775,0) 2(1.775,0)
  silkscreen extent -0.85,-0.75 0.85,0.75
SOT223_N [mm] "SOT223, 4-Leads, Body 6.5x3.5mm, Pitch 2.3mm, Lead Span 7mm, IPC Medium Density"
  rect 2.2x1 smd: 1(-3,2.3) 2(-3,0) 3(-3,-2.3)
  rect 2.2x3.3 smd: 4(3,0)
  silkscreen extent -3.13,-3.35 1.6,3.47, body extent -1.85,-3.35 1.85,3.35, height 1.8
"TERMINAL BLOK 2" [mm] "Terminal blok 3,5mm"
  round 2.5 hole 0.762: 1(0,-2.5) 2(0,2.5)
  silkscreen extent -4,-5 4.13,5
"TERMINAL BLOK 3" [mm] "Terminal blok konektor 3 pina"
  round 2.5 hole 0.762: 1(0,5.08) 2(0,0) 3(0,-5.08)
  silkscreen extent -4,-7.5 4,7.5
TQFP-PT64_N [mm] "Thin QFP, 64-Leads, Body 10x10mm, Pitch 0.5mm, IPC Medium Density"
  oval 1.8x0.3 smd: 1(-5.55,3.75) 2(-5.55,3.25) 3(-5.55,2.75) 4(-5.55,2.25) 5(-5.55,1.75) 6(-5.55,1.25) 7(-5.55,0.75) 8(-5.55,0.25) 9(-5.55,-0.25) 10(-5.55,-0.75) 11(-5.55,-1.25) 12(-5.55,-1.75) 13(-5.55,-2.25) 14(-5.55,-2.75) 15(-5.55,-3.25) 16(-5.55,-3.75) 33(5.55,-3.75) 34(5.55,-3.25) 35(5.55,-2.75) 36(5.55,-2.25) 37(5.55,-1.75) 38(5.55,-1.25) 39(5.55,-0.75) 40(5.55,-0.25) 41(5.55,0.25) 42(5.55,0.75) 43(5.55,1.25) 44(5.55,1.75) 45(5.55,2.25) 46(5.55,2.75) 47(5.55,3.25) 48(5.55,3.75)
  oval 0.3x1.8 smd: 17(-3.75,-5.55) 18(-3.25,-5.55) 19(-2.75,-5.55) 20(-2.25,-5.55) 21(-1.75,-5.55) 22(-1.25,-5.55) 23(-0.75,-5.55) 24(-0.25,-5.55) 25(0.25,-5.55) 26(0.75,-5.55) 27(1.25,-5.55) 28(1.75,-5.55) 29(2.25,-5.55) 30(2.75,-5.55) 31(3.25,-5.55) 32(3.75,-5.55) 49(3.75,5.55) 50(3.25,5.55) 51(2.75,5.55) 52(2.25,5.55) 53(1.75,5.55) 54(1.25,5.55) 55(0.75,5.55) 56(0.25,5.55) 57(-0.25,5.55) 58(-0.75,5.55) 59(-1.25,5.55) 60(-1.75,5.55) 61(-2.25,5.55) 62(-2.75,5.55) 63(-3.25,5.55) 64(-3.75,5.55)
  silkscreen extent -5.67,-4.25 4.25,4.57, body extent -5,-5 5,5, height 1.2
VP60-3.6 [mm] "Capacitor, Ceramic, Thru-Hole, Dipped Radial; Body 11.5 x 3.6 mm (WxT) Pin Spacing 10.16 mm (typ)"
  round 1.35 hole 0.8: 1(-5.08,0) 2(5.08,0)
  silkscreen extent -5.75,-1.8 5.75,1.8
ZZ311 [mm] "SOT-223/SC-73; 4 Leads; Body 6.7 x 7.3 mm, inc. leads (LxW max)"
  rect 1.1x1.55 smd: 1(-2.3,-3.375) 2(0,-3.375) 3(2.3,-3.375)
  rect 3.45x1.55 smd: 4(0,3.375)
  silkscreen extent -3.35,-4.82 3.35,1.85

## Part data
C1 C2: library part EKF00MM147J00, "Aluminum Electrolytic Capacitor, Radial Style with Long Leads: 4.7uF, 63V"
C3 C4 C5 C6 C7 C8 C9 C10 C11 C12 C13 C14 C15 C16 C17 C18 C19 C20 C21 C22 C23 C24 C25 C26 C27 C28 C29 C30 C31 C32 C33 C34 C35 C36 C37 C38 C39 C40 C41 C42 C44 C45 C48 C49 C50 C51 C52 C53 C54 C55 C56 C57 C58 C59 C60 C61 C66 C69 C70 C72 C76 C78 C79 C83 C84 C88: library part C1206, "Ceramic Chip Capacitor - Standard"
C43 C46 C47 C62 C63 C64 C65 C71 C73: library part EKA00DD347F00, "Aluminum Electrolytic Capacitor, Radial Style with Long Leads: 470uF, 35V"
C67 C68: library part VP60BA683KA, "Dipped Radial Multilayer Ceramic Capacitor COG (NPO): 68nF, 50/63V"
C74: library part C0805, "Ceramic Chip Capacitor - Standard"
C75 C77 C80 C81 C82 C85 C86 C87: library part EKA00AA310D00, "Aluminum Electrolytic Capacitor, Radial Style with Long Leads: 100uF, 16V"
D1 D2 D3 D4 D5 D6 D7 D8 D9 D10 D11 D12 D13 D14 D15 D16 D17 D18 D19 D20 D21 D22 D23 D24 D25 D26 D27 D28 D29 D30 D31 D32: library part BZV85-C5V1, "Voltage Regulator Diode"
D47 D48 D59 D60: library part "D Zener", "Zener Diode"
D49 D50 D51 D52: library part "Diode 1N4007", "1 Amp General Purpose Rectifier"
D53: "General-purpose Diode"
D54: library part "LED 3mm"
D55 D56 D57 D58: library part "Diode 1N4148", "High Conductance Fast Diode"
L1: library part "MREZNI FILTER"
L2 L3 L4 L5: library part PCMC063T-R82MN, "SMT Power Choke Coil; Size 7.3×6.6×3.0mm, ±20% Tolerance, 0.82uH, 13A"
P1 P2 P3 P5 P6: library part "Header 5X2", "Header, 5-Pin, Dual row"
P4: library part "Header 5", "Header, 5-Pin"
P7 P8 P9 P10 P11 P12 P13 P14 P15 P16 P17 P18 P19 P20 P21 P22 P23 P24 P25 P26 P27 P28 P29 P30 P31 P32 P33 P34 P35 P36 P39 P40 P41 P42 P43 P44 P46 P48: library part "Terminal blok 2 pina", "Terminal blok 2"
P37 P38 P45 P47 P49 P50 P52 P55 P57 P59 P61 P63: "Header, 5-Pin, Dual row"
P51 P53 P54 P56 P60: library part "TERMINAL BLOK 2", "Terminal blok konektor 3,5 mm"
P58 P62: library part "TERMINAL BLOK 3", "3 pinski terminal blok konektor"
Q1 Q2 Q3 Q4 Q5 Q6 Q7 Q8: "NPN Medium Power Transistor"
R1 R2 R3 R4 R5 R6 R7 R8 R9 R10 R11 R12 R31 R32 R33 R34 R35 R36 R37 R38 R80 R81 R82 R83 R84 R85 R86 R87 R88 R89 R90 R91 R92 R93 R94 R95 R96 R97 R98 R99 R100 R101 R102 R103 R104 R105 R106 R107 R108 R109 R110 R111 R131: library part ERA3Y, "Rectangular Thick Film Chip Resistor, 10 Ohm to 330k Ohm Range, 0.1% and 0.5% Tolerance, 0603 Size, 0.063 W"
R13 R14 R15 R16 R17 R18 R19 R20 R21 R22 R23 R24 R25 R26 R27 R28 R29 R30 R39 R40 R41 R42 R43 R44 R45 R46 R47 R48 R49 R50 R51 R52 R53 R54 R55 R56 R112 R119 R136 R143: library part ERA6Y, "Rectangular Thick Film Chip Resistor, 10 Ohm to 1M Ohm Range, 0.1% and 0.5% Tolerance, 0805 Size, 0.1 W"
R57 R58 R59 R60 R61 R62 R63 R64 R65 R66 R67 R68 R69 R70 R71 R72 R73 R74 R75 R76 R77 R78 R79 R114 R115 R117 R121 R122 R123 R125 R126 R128 R132 R133 R134 R135 R138 R139 R141 R145 R146 R147: library part ERAS, "Metal Film Thermosensitive Chip Resistor, 0.56 Ohm to 10k Ohm Range, 5% Tolerance, 0805 Size, 0.1 W"
R113 R116 R120 R137 R140 R144: library part ERJ8GE, "Thick Film Chip Resistor, 1 Ohm to 10M Ohm Range, 5% Tolerance, 1206 Size, 0.25 W"
R118 R142: library part Res2, "Resistor"
R124 R127: library part ERG12, "Metal Oxide Film Resistor, 0.1 Ohm to 47k Ohm Range, 2% and 5% Tolerance, 0.5 W"
R129 R130: library part ERDS1T, "Carbon Film Resistor, 1 Ohm to 3.3M Ohm Range, 5% Tolerance, 0.5 W"
S1 S2: library part "SW DIP-3", "DIP Switch, 3 Position, SPST"
U1: "High Performance, 1-Mbit Flash Microcontroller with nanoWatt Technology, 64K Flash, 64-Pin TQFP, Industrial Temperature Range"
U2 U3 U4 U5: "Octal Buffer/Driver with 3-State Outputs"
U6 U24: "3-Terminal Adjustable Positive Voltage Regulator"
U7 U9 U13: "Octal D-Type Edge-Triggered Flip-Flop with 3-State Outputs"
U8 U10: "High-Voltage, High-Current Darlington Array"
U11 U12 U14 U15 U16 U17 U20 U22 U23 U30 U32 U33: library part Optoisolator1, "4-Pin Phototransistor Optocoupler"
U18 U19: "Low-Power Quad Operational Amplifier"
U21 U31: "Low-Power, Slew-Rate-Limited RS-485/RS-422 Transceiver"
U25 U28 U29: "3-Terminal Low-Current Positive Fixed Voltage Regulator"
U26: "DC-to-DC Converter Control Circuit"
U27: "800mA and 1A Low Dropout Positive Regulator 2.85V, 3.3V, 5V, and Adjustable"

## Free pads (board coordinates)
  round 1.524 hole 0.762: 0(146.304,75.438) 0(168.849,80.477) 1(146.177,70.358) 2(146.304,65.278) 3(146.304,60.198) 4(146.304,55.118) 5(146.304,50.038) 6(146.304,44.958) 7(146.304,41.021) 8(146.177,80.391) 9(146.177,82.423) 10(141.732,85.217) 11(141.732,87.884) 12(136.652,88.011) 13(131.572,88.138) 14(126.492,88.011) 15(121.285,88.011)

## Via types
v1: diameter 1.27, hole 0.711, Top Layer to Bottom Layer, 155 vias

## Nets (pads, with @x,y where several pads share a name; then routed paths per layer and width w, separated by ;. In a path a pad name is that pad's centre, name@x,y a point inside that pad or via, vN(x,y) a via of type N, cw(c..) or ccw(c..) an arc to the next point about the centre after c; other vN are vias at no path point)
+3V3: C2.1 C3.1 C4.1 C5.1 C6.1 C75.1 C76.2 P4.2 P59.4 P63.4 R6.2 R12.2 R131.1 U1.18 U1.19 U1.26 U1.38 U1.57 U27.2 U27.4 | length 345.5
  Top Layer w0.3: v1(100.33,18.923) 102.108,20.701 102.108,21.553 U1.18@101.906,21.755 U1.19@102.406,21.755 ; 104.521,30.861 104.906,31.246 U1.57@104.906,32.855 ; v1(107.442,16.51) 107.442,16.764 105.906,18.3 U1.26@105.906,21.755 105.906,23.693 108.268,26.055 U1.38@110.706,26.055
  Top Layer w0.5: v1(96.647,37.465) 96.647,36.322 100.806,32.163 100.806,31.655 101.6,30.861 104.521,30.861
  Top Layer w1: v1(112.014,16.002) 115.062,12.954 v1(115.062,11.049) ; v1(136.652,35.306) 139.192,35.306 151.765,22.733 v1@151.765,21.844
  Top Layer w1.5: v1(80.137,30.226) 80.137,22.86 78.994,21.717 78.994,9.906 82.931,5.969 96.774,5.969 97.536,6.731 97.536,12.146 100.33,14.94 v1(100.33,18.923)
  Top Layer w2: C75.1@34.814,35.306 34.814,36.973 39.37,41.529 46.736,41.529 51.562,36.703 73.66,36.703 v1(80.137,30.226) 84.201,26.162 C2.1@85.979,26.162
  Bottom Layer w0.5: 88.265,19.431 88.265,24.13 88.334,24.199
  Bottom Layer w1: U27.4@27.686,43.126 U27.2@27.686,36.376 27.686,34.798 28.448,34.036 32.004,34.036 33.274,35.306 C75.1@34.71,35.306 ; R131.1@34.71,33.147 C75.1@34.71,35.306 ; C76.2@35.049,38.354 34.71,38.015 C75.1@34.71,35.306 ; C2.1@85.979,26.555 88.334,24.199 89.931,22.603 C6.1@100.584,22.603 101.981,22.603 ; 88.265,19.431 89.408,18.288 P63.4@89.535,18.288 ; v1(100.33,18.923) 102.108,20.701 ; v1(112.014,16.002) 107.95,16.002 v1(107.442,16.51) 107.442,19.812 ; v1(115.062,11.049) 115.101,11.01 R6.2@115.101,9.525 ; 117.221,35.306 116.967,35.56 136.144,35.56 136.398,35.306 v1(136.652,35.306) ; R12.2@122.389,24.13 122.682,24.423 P4.2@122.682,25.654 ; P59.4@148.209,9.652 149.86,8.001 152.273,8.001 153.162,8.89 153.162,20.574 152.273,21.463 152.019,21.463 v1(151.892,21.336) ; 101.981,22.603 C5.1@102.997,22.603 C4.1@105.283,22.603 C3.1@107.95,22.603 107.442,22.095 107.442,19.812 ; 101.981,22.603 102.108,22.476 102.108,20.701 ; 102.108,20.701 106.553,20.701 107.442,19.812
  Bottom Layer w1.5: v1(80.137,30.226) 84.104,34.193 90.551,34.193 93.757,37.399 v1@96.647,37.399 ; v1(96.647,37.465) 105.283,37.465 107.442,35.306 117.221,35.306 117.221,30.607 118.618,29.21 122.682,29.21 P4.2@122.682,25.654